# EAGLE board HF_front (EAGLE 6.4)
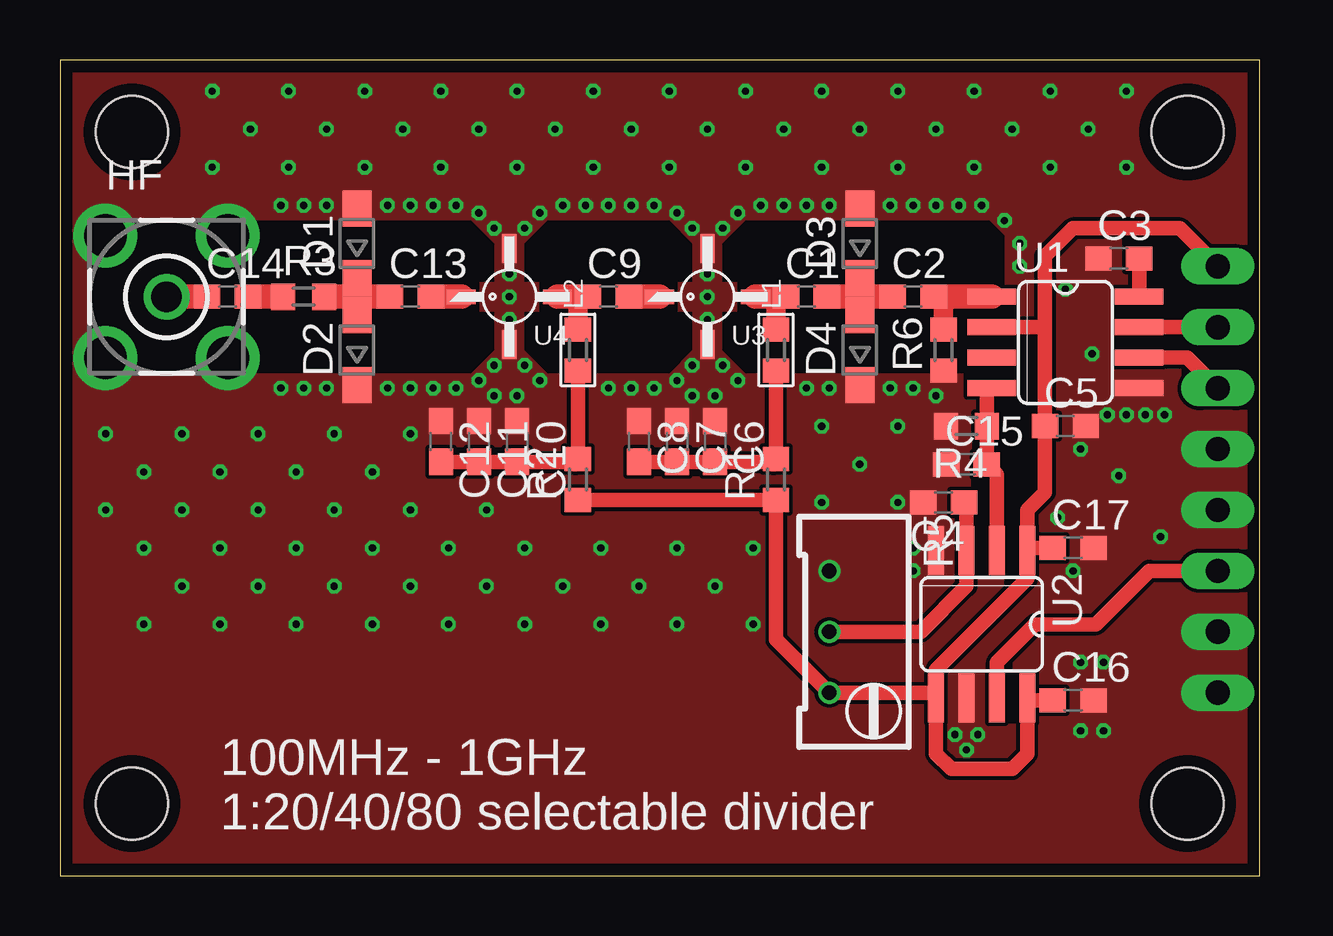
[diagram p0: board, top side]
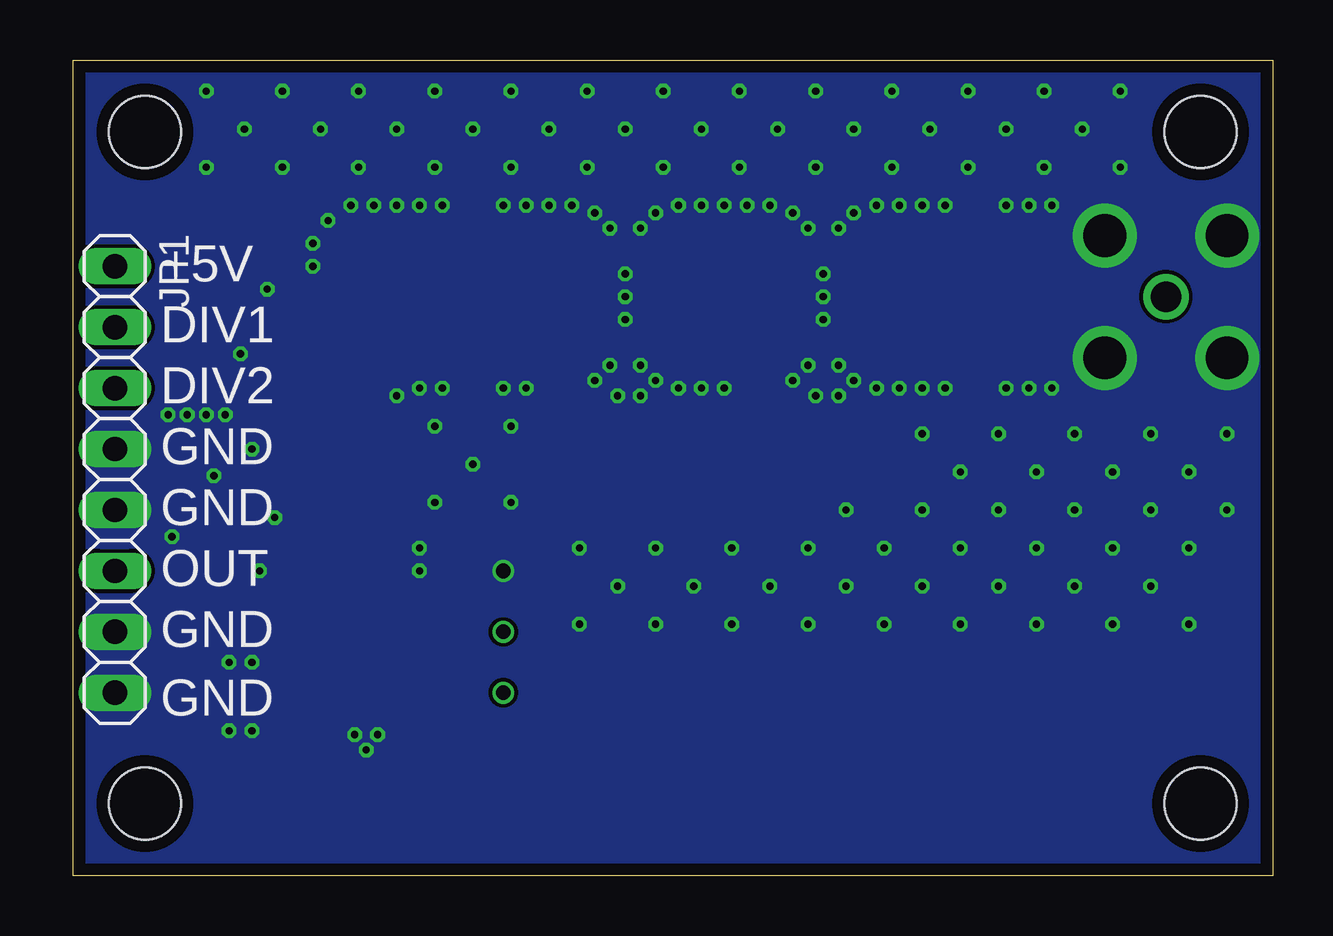
[diagram p1: board, bottom side, seen from below]

Size 50 x 34 mm. Coordinates in mm from the lower left corner, seen from the top.
Outline: 0,0 50,0 50,34 0,34 0,0
Copper layers (1*16): Top 0.035mm / dielectric 1.6mm / Bottom 0.035mm
Design rules "Elecrow_2-layer_PCB_eagle_rule": minimum track width 6mil, minimum drill 0.3mm, track to track 6mil, track to pad 6mil, pad to pad 6mil, via to via 8mil, smd to smd 0mil, copper to edge 20mil, drill to drill 10mil, minimum pad ring 6mil, minimum via ring 6mil, stop-mask expansion 0mil, vias tented up to drill 100mil, thermal gap 10mil
Holes 3 mm at 3,31 47,31 3,3 47,3
tRestrict: area 13,24.8 to 18.1,27.3; area 13,21 to 18.1,23.5; area 19.4,24.8 to 26.4,27.3; area 19.4,21 to 21,23.5; area 22.2,21 to 26.4,23.5; area 7.9,24.8 to 11.4,27.3; area 7.9,21 to 11.4,23.5; area 27.6,24.8 to 32.7,27.3; area 27.6,21 to 29.2,23.5; area 30.5,21 to 32.7,23.5; area 34,21 to 37.5,23.5; area 34,24.8 to 39.4,27.3; 5 more areas

## Footprints (pad centres in the part's own frame; a part is rotated, then mirrored left to right if it is on the bottom)
C0603 = smd 1.1 x 1: 1 -0.85,0; 2 0.85,0
SOD323-W = smd 1.5 x 1.2: A 1.45,0; C -1.45,0
BU-SMA-V = drill 1.27: 1 0,0 | drill 1.778: 2 -2.55,2.55; 3 2.55,2.55; 4 2.55,-2.55; 5 -2.55,-2.55
1X08 = drill 1.016 long: 1 -8.89,0; 2 -6.35,0; 3 -3.81,0; 4 -1.27,0; 5 1.27,0; 6 3.81,0; 7 6.35,0; 8 8.89,0
R0603 = smd 1.1 x 1: 1 0,-0.85; 2 0,0.85
R0603' = smd 1 x 1.1: 1 -0.85,0; 2 0.85,0
RTRIM64W = drill 0.61: 1 1.27,-2.54; 2 1.27,0; 3 1.27,2.54
SOIC8 = smd 0.66 x 2.032: 1 -1.905,-3.073; 2 -0.635,-3.073; 3 0.635,-3.073; 4 1.905,-3.073; 5 1.905,3.073; 6 0.635,3.073; 7 -0.635,3.073; 8 -1.905,3.073
MICRO-X = smd 0.6 x 1.2: GND1 0,-2; GND2 0,2 | smd 1.2 x 0.6: IN -2,0; OUT 2,0

## Placement (x,y rotation side)
C1  100p  [C0603]  31.11,24.13 0 top
C2  1n  [C0603]  35.56,24.13 0 top
C3  1n  [C0603]  44.13,25.72 0 top
C4  100n  [C0603]  36.83,15.56 180 top
C5  100n  [C0603]  41.91,18.73 0 top
C6  100p  [C0603]  27.3,18.1 270 top
C7  1n  [C0603]  25.72,18.1 270 top
C8  2µ2  [C0603]  24.13,18.1 270 top
C9  100p  [C0603]  22.86,24.13 0 top
C10  100p  [C0603]  19.05,18.1 270 top
C11  1n  [C0603]  17.46,18.1 270 top
C12  2µ2  [C0603]  15.88,18.1 270 top
C13  100p  [C0603]  14.61,24.13 0 top
C14  100p  [C0603]  6.99,24.13 0 top
C15  8p  [C0603]  37.78,17.14 0 top
C16  100n  [C0603]  42.23,7.3 0 top
C17  100n  [C0603]  42.23,13.65 0 top
D1  [SOD323-W]  12.38,26.35 90 top
D2  [SOD323-W]  12.38,21.91 90 top
D3  [SOD323-W]  33.34,26.35 90 top
D4  [SOD323-W]  33.34,21.91 90 top
HF  BU-SMA-V  [BU-SMA-V]  4.45,24.13 0 top
JP1  [1X08]  48.26,16.51 270 bottom
L1  270n  [R0603]  29.84,21.91 0 top
L2  270n  [R0603]  21.59,21.91 0 top
R1  56  [R0603']  29.84,16.51 90 top
R2  56  [R0603']  21.59,16.51 90 top
R3  10  [R0603']  10.16,24.13 0 top
R4  6k8  [R0603']  37.78,18.73 180 top
R5  [RTRIM64W]  33.34,10.16 180 top
R6  50  [R0603']  36.83,21.91 90 top
U1  MC12080  [SOIC8]  41.91,22.23 270 top
U2  MAX9203  [SOIC8]  38.42,10.48 180 top
U3  HMC476MP86  [MICRO-X]  26.99,24.13 0 top
U4  HMC476MP86  [MICRO-X]  18.73,24.13 0 top

## Library data of the parts
C1-C17 R1-R6 = resistor
D1-D4 = diode
HF = con-coax; OC_FARNELL: unknown; OC_NEWARK: unknown
JP1 = pinhead
L1 L2 = xmaker
U1-U4 = dmm

## Nets
+5V: C5.1 C16.1 C17.1 JP1.1 R1.1 R2.1 R5.3 U1.2 U2.1 U2.5 U2.8
GND: C3.1 C4.2 C5.2 C6.1 C7.1 C8.1 C10.1 C11.1 C12.1 C15.1 C16.2 C17.2 D1.A D2.C D3.A D4.C HF.2 HF.3 HF.4 HF.5 JP1.4 JP1.5 JP1.7 JP1.8 R4.2 R5.1 R6.1 U1.5 U2.4 U2.6 U3.GND1 U3.GND2 U4.GND1 U4.GND2
N$1: C6.2 C7.2 C8.2 L1.1 R1.2
N$2: C1.1 L1.2 U3.OUT
N$3: C10.2 C11.2 C12.2 L2.1 R2.2
N$4: C9.1 L2.2 U4.OUT
N$5: C9.2 U3.IN
N$6: C2.2 R6.2 U1.1
N$7: C3.2 U1.8
N$8: C15.2 R4.1 U1.4 U2.2
N$9: C4.1 R5.2 U2.3
N$10: C14.1 HF.1
N$11: C14.2 R3.1
N$12: C13.1 D1.C D2.A R3.2
N$13: C13.2 U4.IN
N$14: C1.2 C2.1 D3.C D4.A
N$16: JP1.6 U2.7
N$17: JP1.2 U1.7
N$18: JP1.3 U1.6

## Tracks (layer width: path | path; a pad name or v marks a point on that pad's centre or on a via)
+5V
  Top 0.61: R2.1 R1.1 29.84,9.84 R5.3 36.3,7.62 U2.5 | U1.2 41.06,22.86 | 41.06,22.86 41.06,25.82 42.23,26.99 46.67,26.99 JP1.1 | 41.06,22.86 C5.1 41.06,15.98 40.32,15.24 U2.1 | U2.1 | C17.1 40.42,13.65 U2.1 | C16.1 40.42,7.3 U2.8 40.32,5.08 39.69,4.45 37.15,4.45 36.51,5.08 U2.5 | U2.5 36.51,8.57 40.32,12.38 U2.1
GND  (via drill 0.3)
  other vias: 18.1,26.99 17.46,27.62 16.51,27.94 15.56,27.94 14.61,27.94 13.65,27.94 28.26,27.62 11.11,27.94 10.16,27.94 9.21,27.94 27.62,26.99 19.37,26.99 20,27.62 20.95,27.94 21.91,27.94 22.86,27.94 23.81,27.94 26.35,26.99 24.77,27.94 25.72,27.62 29.21,27.94 30.16,27.94 31.11,27.94 32.07,27.94 34.61,27.94 35.56,27.94 36.51,27.94 37.47,27.94 38.42,27.94 39.37,27.3 40.01,26.35 40.01,25.4 19.37,21.27 20,20.64 18.1,21.27 17.46,20.64 16.51,20.32 15.56,20.32 14.61,20.32 13.65,20.32 19.05,20 18.1,20 27.3,20 26.35,20 11.11,20.32 10.16,20.32 9.21,20.32 27.62,21.27 28.26,20.64 32.07,20.32 31.11,20.32 34.61,20.32 35.56,20.32 36.51,20 18.73,23.18 18.73,24.13 18.73,25.08 26.99,24.13 26.99,25.08 26.99,23.18 26.35,21.27 25.72,20.64 24.77,20.32 23.81,20.32 22.86,20.32 6.35,29.53 6.35,32.7 7.94,31.11 11.43,15.24 11.43,18.41 13.02,16.83 14.61,15.24 14.61,18.41 8.26,15.24 8.26,18.41 9.84,16.83 5.08,15.24 5.08,18.41 6.67,16.83 1.91,15.24 1.91,18.41 3.49,16.83 3.49,10.48 3.49,13.65 5.08,12.06 6.67,10.48 6.67,13.65 8.26,12.06 13.02,10.48 13.02,13.65 14.61,12.06 9.84,10.48 9.84,13.65 11.43,12.06 16.19,10.48 16.19,13.65 17.78,12.06 19.37,10.48 19.37,13.65 20.95,12.06 22.54,10.48 22.54,13.65 24.13,12.06 25.72,10.48 25.72,13.65 27.3,12.06 28.89,13.65 28.89,10.48 41.27,29.53 41.27,32.7 42.86,31.11 38.1,29.53 38.1,32.7 39.69,31.11 34.92,29.53 34.92,32.7 36.51,31.11 31.75,29.53 31.75,32.7 33.34,31.11 28.57,29.53 28.57,32.7 30.16,31.11 25.4,29.53 25.4,32.7 26.99,31.11 22.23,29.53 22.23,32.7 23.81,31.11 19.05,29.53 19.05,32.7 20.64,31.11 15.88,29.53 15.88,32.7 17.46,31.11 12.7,29.53 12.7,32.7 14.29,31.11 9.53,29.53 9.53,32.7 11.11,31.11 17.78,15.24 44.45,29.53 44.45,32.7 31.75,15.56 31.75,18.73 33.34,17.14 34.92,15.56 34.92,18.73 41.59,14.92 42.55,17.78 44.13,16.67 45.88,14.13 46.04,19.21 43.66,19.21 43.02,21.75 41.91,24.45 37.31,5.87 38.26,5.87 37.78,5.24 35.56,12.7 35.56,13.65 45.24,19.21 44.45,19.21 42.23,12.7 42.55,6.03 43.5,6.03 43.5,8.89 42.55,8.89
  pour Top (no thermals): -2.54,36.83 50.8,36.83 50.8,-1.27 -2.54,-1.27
  pour Bottom (no thermals): -1.27,35.56 52.07,35.56 52.07,-2.54 -1.27,-2.54
N$1
  Top 0.61: C8.2 C7.2 C6.2 29.73,17.25 | R1.2 L1.1
  Top 0.813: 29.73,17.25 R1.2
N$2
  Top 0.813: L1.2 29.84,23.81 29.53,24.13
  Top 1.016: U3.OUT 29.53,24.13 C1.1
N$3
  Top 0.61: R2.2 L2.1 | C12.2 C11.2 C10.2 21.48,17.25
  Top 0.813: 21.48,17.25 R2.2
N$4
  Top 0.813: L2.2 21.59,23.97 21.43,24.13
  Top 1.016: U4.OUT 21.43,24.13 C9.1
N$5
  Top 1.016: C9.2 U3.IN
N$6
  Top 0.813: R6.2 36.83,23.81 37.15,24.13
  Top 1.016: C2.2 37.15,24.13 U1.1
N$7
  Top 0.61: U1.8 C3.2
N$8
  Top 0.61: U1.4 38.63,20.12 R4.1 C15.2 39.05,16.73 U2.2
N$9
  Top 0.61: R5.2 35.88,10.16 37.78,12.06 U2.3 37.78,15.34 C4.1
N$10
  Top 1.016: C14.1 HF.1
N$11
  Top 1.016: C14.2 R3.1
N$12
  Top 1.016: R3.2 12.38,24.13 | 12.38,24.13 C13.1 | D1.C 12.38,24.13 | D2.A 12.38,24.13
N$13
  Top 1.016: C13.2 U4.IN
N$14
  Top 1.016: C1.2 33.34,24.13 | 33.34,24.13 C2.1 | D4.A 33.34,24.13 | D3.C 33.34,24.13
N$16
  Top 0.61: U2.7 39.05,8.89 40.64,10.48 43.18,10.48 45.4,12.7 JP1.6
N$17
  Top 0.61: U1.7 JP1.2
N$18
  Top 0.61: U1.6 46.99,21.59 JP1.3

## Text on the board
tPlace: 100MHz - 1GHz / 1:20/40/80 selectable divider
bPlace: +5V | DIV1 | DIV2 | GND | GND | OUT | GND | GND